# Altium PCB ECG_Signals_V1.0_ZM_20211208.PcbDoc (part 2 of 2)
Units mil, origin at the board's own origin, x right, y up, seen from the top; angles counter-clockwise.
Board outline 3748.77 x 3514.74 mil, 2 copper layers (Top Layer, Bottom Layer); 331 components, 192 nets, 916 pads, 807 vias.
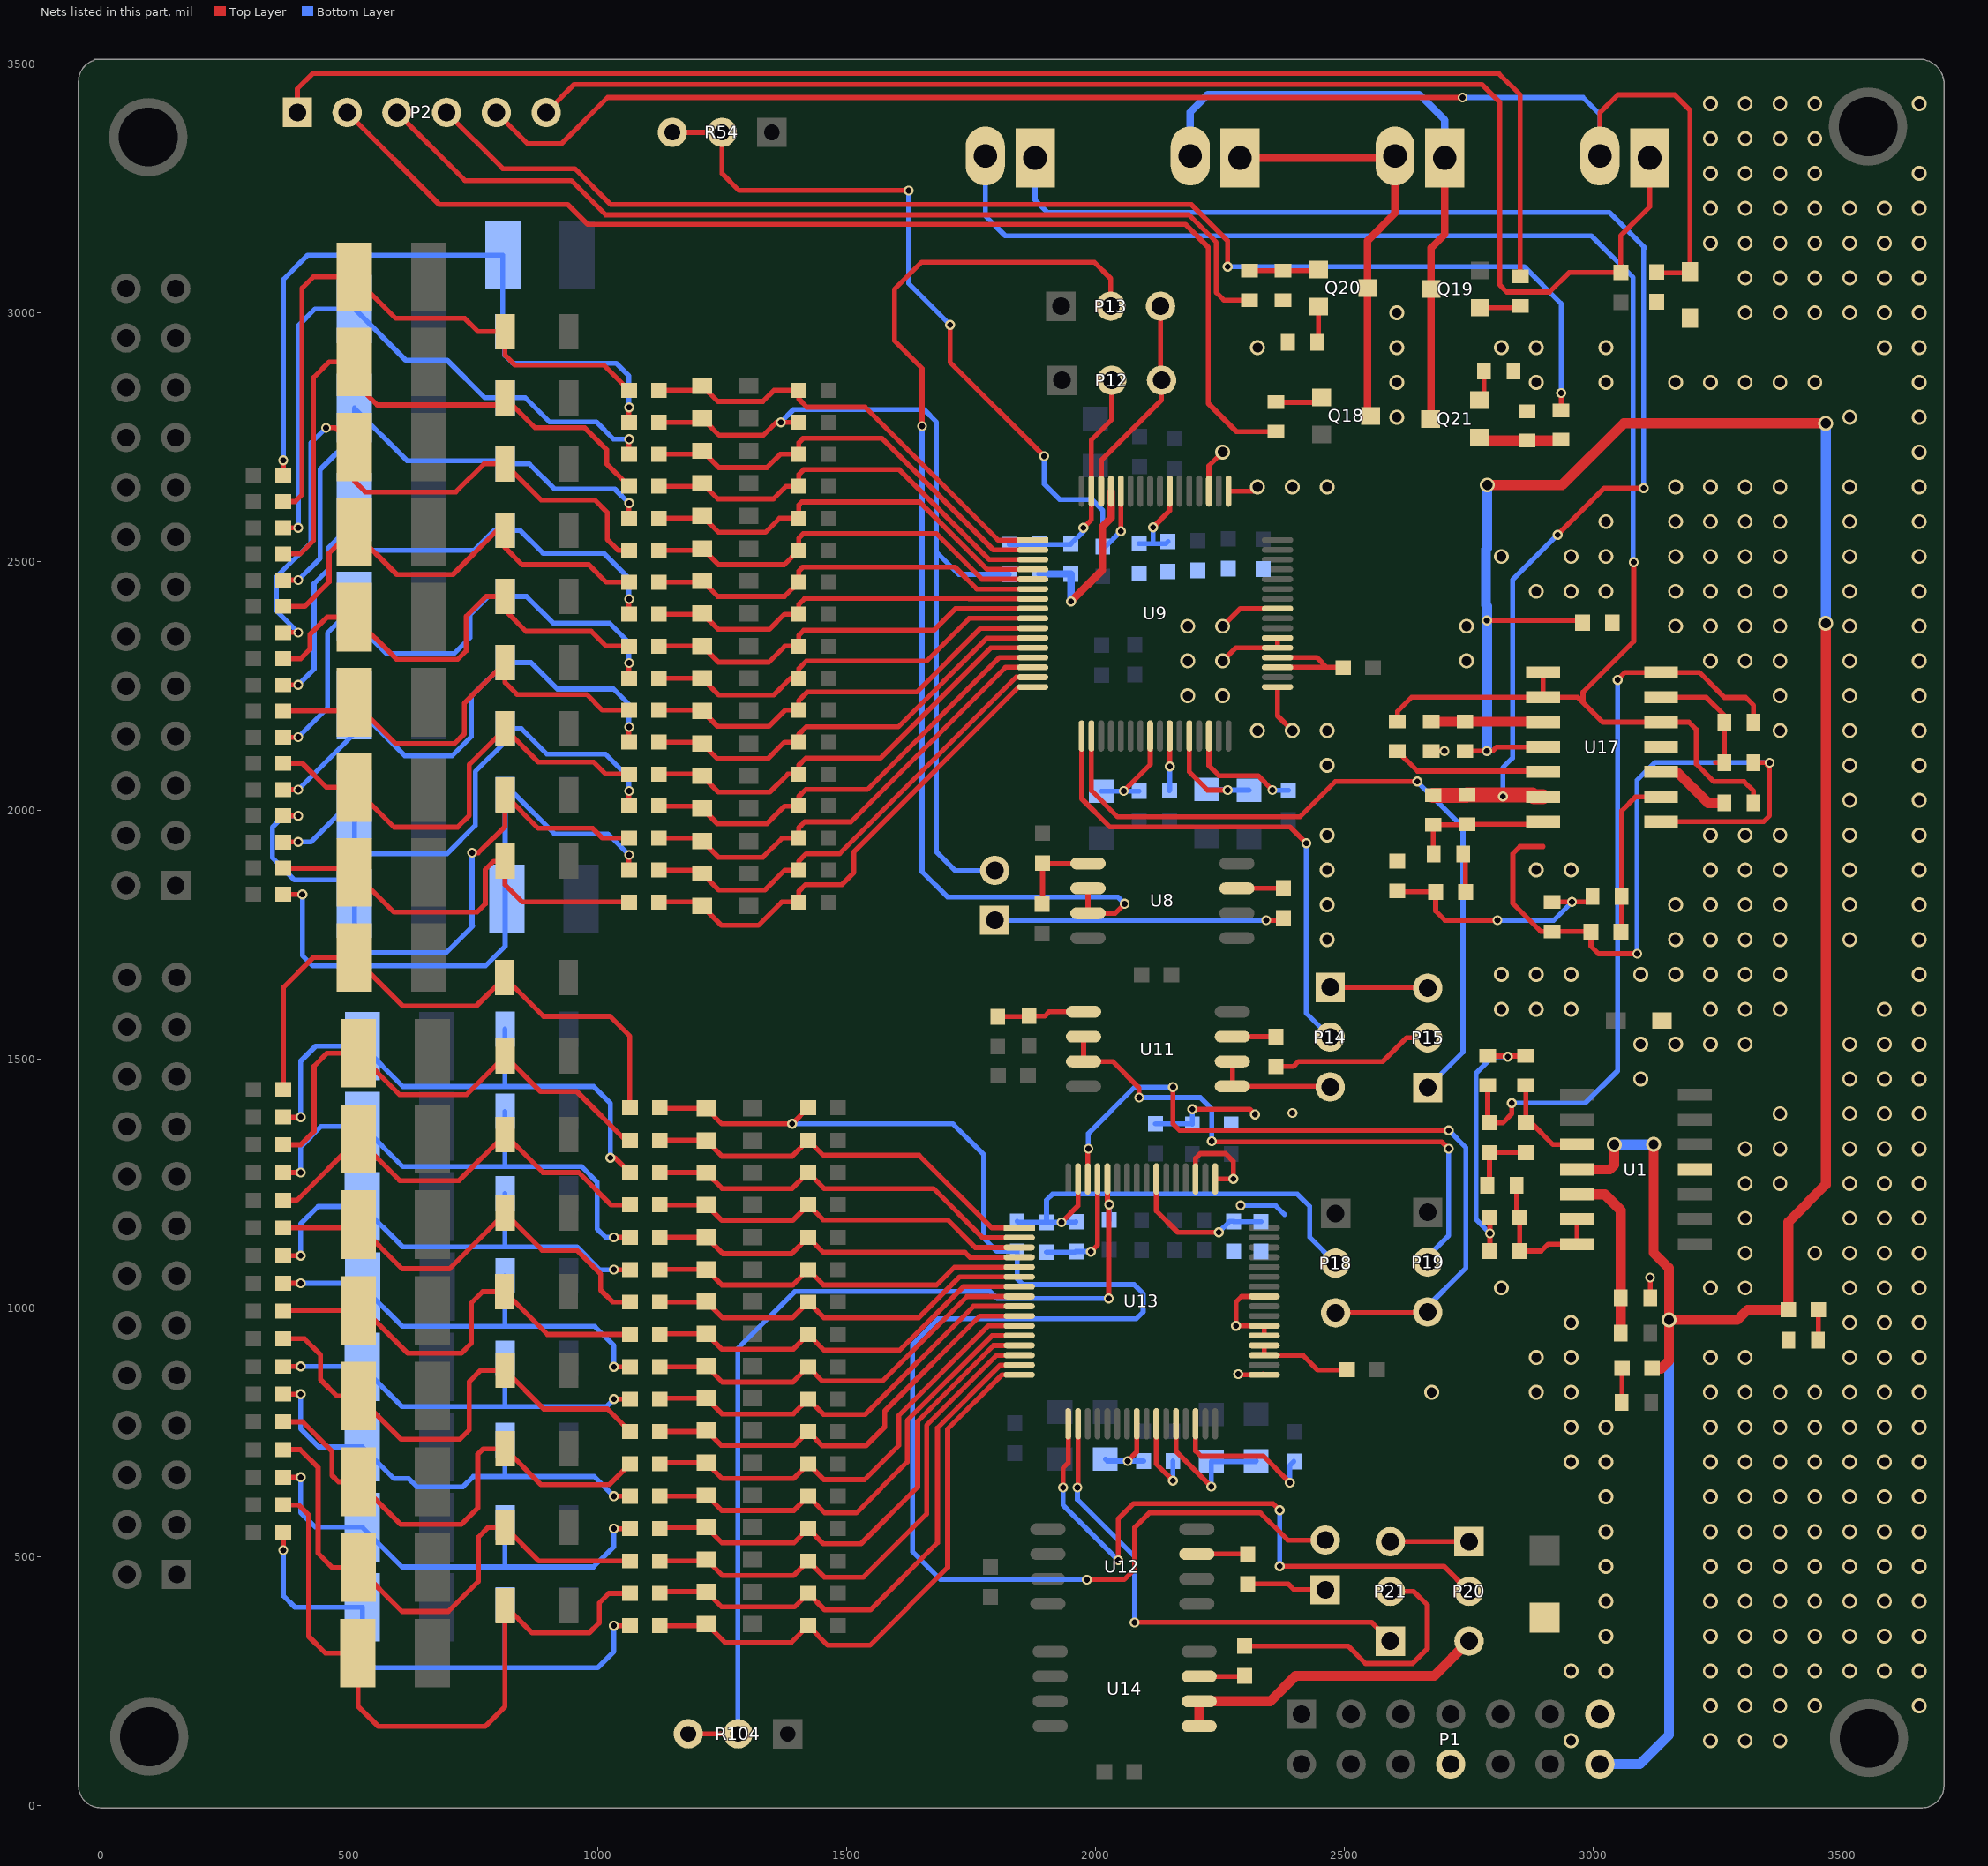
[diagram p2: the nets of this part, all layers, seen from the top]

## Via types
v1: diameter 30, hole 20, Top Layer to Bottom Layer, tented both sides, 564 vias
v2: diameter 20, hole 12, Top Layer to Bottom Layer, tented both sides, 243 vias

## Nets (pads, with @x,y where several pads share a name; then routed paths per layer and width w, separated by ;. In a path a pad name is that pad's centre, name@x,y a point inside that pad or via, vN(x,y) a via of type N, cw(c..) or ccw(c..) an arc to the next point about the centre after c; other vN are vias at no path point) (continued)
GND: C38.1 C41.1 C95.1 C96.1 C97.1 C100.1 C101.1 C148.1 C149.1 C150.1 C155.1 C160.2 P1.8 P1.13 R145.1 R160.1 R164.2 R172.1 R178.2 RC5.1 RC6.2 RC7.2 RC8.1 TVS41.1 TVS42.1 U1.11 U9.33 U9.37 U9.38 U9.41 U9.49 U9.51 U13.33 U13.37 U13.38 U13.41 U13.49 U13.51 U17.11 | length 1354.5
  Top Layer w10: v2(2194,1399.09) 2309.54,1399.09 v2(2320,1388.63) ; U13.51@2200.43,1259 2200.43,1300.43 2209.88,1309.88 2260.61,1309.88 2276.37,1294.12 v2(2276.37,1259) U13.49@2239.8,1259 ; U9.51@2227.33,2641.54 2227.33,2692.33 v1(2255,2720) ; v1(2255,2300) 2281.57,2326.57 U9.37@2365.13,2326.57 U9.38@2365.13,2346.26 ; v1(2255,2370) 2290.31,2405.31 U9.41@2365.13,2405.31 ; U9.49@2266.7,2641.54 2316.54,2641.54 v1(2325,2650) ; v2(2286,866.63) 2287.33,865.3 U13.33@2338.22,865.3 U13.33@2336.89,866.63 ; U13.37@2338.22,944.04 U13.38@2338.22,963.72 v2(2281.91,963.72) 2281.91,1011.78 2292.9,1022.78 U13.41@2338.22,1022.78 ; U9.33@2365.13,2247.83 2365.13,2189.87 v1(2395,2160) ; R172.1@2674,2119 v2(2700.63,2119) ; R178.2@3114.06,1020 v2(3114.06,1060.93)
  Bottom Layer w10: C150.1@2120,1370 2193,1370 C149.1@2194,1369 v2(2194,1399.09) ; v2(2291,1205.63) 2361,1205.63 2379,1187.63
  other v1: 2955,130 3235,130 3305,130 3375,130 3235,200 3305,200 3375,200 3445,200 3655,200 2955,270 3025,270 3235,270 3305,270 3375,270 3445,270 3515,270 3585,270 3655,270 3025,340 3235,340 3305,340 3375,340 3445,340 3515,340 3585,340 3655,340 3025,410 3235,410 3305,410 3375,410 3445,410 3515,410 3585,410 3655,410 3025,480 3235,480 3305,480 3375,480 3445,480 3515,480 3585,480 3655,480 3025,550 3235,550 3305,550 3375,550 3445,550 3515,550 3585,550 3655,550 3025,620 3235,620 3305,620 3375,620 3445,620 3515,620 3585,620 3655,620 2955,690 3025,690 3235,690 3305,690 3375,690 3445,690 3515,690 3585,690 3655,690 2955,760 3025,760 3235,760 3305,760 3375,760 3445,760 3515,760 3585,760 3655,760 2675,830 2885,830 2955,830 3235,830 3305,830 3375,830 3445,830 3515,830 3585,830 3655,830 2885,900 2955,900 3235,900 3305,900 3515,900 3585,900 3655,900 2955,970 3515,970 3585,970 3655,970 2815,1040 3235,1040 3305,1040 3515,1040 3585,1040 3655,1040 3305,1110 3445,1110 3515,1110 3585,1110 3655,1110 3305,1180 3515,1180 3585,1180 3655,1180 3305,1250 3375,1250 3515,1250 3585,1250 3655,1250 3305,1320 3375,1320 3515,1320 3585,1320 3655,1320 3375,1390 3515,1390 3585,1390 3655,1390 3095,1460 3515,1460 3585,1460 3655,1460 3095,1530 3165,1530 3235,1530 3305,1530 3515,1530 3585,1530 3655,1530 2815,1600 2885,1600 2955,1600 3235,1600 3305,1600 3375,1600 3585,1600 3655,1600 2815,1670 2885,1670 2955,1670 3095,1670 3165,1670 3235,1670 3305,1670 3375,1670 3655,1670 2465,1740 3165,1740 3235,1740 3305,1740 3375,1740 3515,1740 3655,1740 2465,1810 3165,1810 3235,1810 3305,1810 3375,1810 3515,1810 3655,1810 2465,1880 2885,1880 2955,1880 3235,1880 3305,1880 3375,1880 3515,1880 3655,1880 2465,1950 3235,1950 3305,1950 3375,1950 3515,1950 3655,1950 3515,2020 3655,2020 2465,2090 3515,2090 3655,2090 2325,2160 2465,2160 3375,2160 3515,2160 3655,2160 2185,2230 2255,2230 3375,2230 3515,2230 3655,2230 2185,2300 2745,2300 3235,2300 3305,2300 3375,2300 3515,2300 3655,2300 2185,2370 2745,2370 3165,2370 3235,2370 3305,2370 3375,2370 3515,2370 3655,2370 2885,2440 2955,2440 3025,2440 3165,2440 3235,2440 3305,2440 3375,2440 3515,2440 3655,2440 2815,2510 2955,2510 3025,2510 3165,2510 3235,2510 3305,2510 3375,2510 3515,2510 3655,2510 3025,2580 3165,2580 3235,2580 3305,2580 3375,2580 3515,2580 3655,2580 2395,2650 2465,2650 3165,2650 3235,2650 3305,2650 3375,2650 3515,2650 3655,2650 3655,2720 2605,2790 3515,2790 3655,2790 2605,2860 2885,2860 3025,2860 3165,2860 3235,2860 3305,2860 3375,2860 3445,2860 3655,2860 2325,2930 2605,2930 2815,2930 2885,2930 3025,2930 3585,2930 3655,2930 2605,3000 3305,3000 3375,3000 3445,3000 3515,3000 3585,3000 3655,3000 3305,3070 3375,3070 3445,3070 3515,3070 3585,3070 3655,3070 3235,3140 3305,3140 3375,3140 3445,3140 3515,3140 3585,3140 3655,3140 3235,3210 3305,3210 3375,3210 3445,3210 3515,3210 3585,3210 3655,3210 3235,3280 3305,3280 3375,3280 3445,3280 3655,3280 3235,3350 3305,3350 3375,3350 3445,3350 3235,3420 3305,3420 3375,3420 3445,3420 3655,3420
  other v2: 2395,1391.63
IN1N: C46.2 R63.2 TVS2.2 U9.15 | length 955.3
  Top Layer w10: R63.2@1122,1879.9 1202.06,1879.9 TVS2.2@1209,1872.97 1242.34,1839.63 1335,1839.63 1375.27,1879.9 C46.2@1403,1879.9 1403,1897.63 1418,1912.63 1485,1912.63 1839.89,2267.52 U9.15@1873,2267.52
IN1P: C43.2 R61.2 TVS1.2 U9.16 | length 1006.1
  Top Layer w10: R61.2@1122,1815.63 1201,1815.63 TVS1.2@1209,1807.63 1248,1768.63 1322,1768.63 1369,1815.63 C43.2@1403,1815.63 1403,1837 1416.63,1850.63 1490,1850.63 1514,1874.63 1514,1916.63 1845.2,2247.83 U9.16@1873,2247.83
IN2N: C58.2 R70.2 TVS7.2 U9.13 | length 915.5
  Top Layer w10: R70.2@1122,2008.45 1204.19,2008.45 TVS7.2@1209,2003.64 1240.01,1972.63 1339,1972.63 1374.82,2008.45 C58.2@1403,2008.45 1403,2027.63 1417,2041.63 1541,2041.63 1806.26,2306.89 U9.13@1873,2306.89
IN2P: C53.2 R68.2 TVS6.2 U9.14 | length 937
  Top Layer w10: R68.2@1122,1944.18 1203.12,1944.18 TVS6.2@1209,1938.3 1241.67,1905.63 1331,1905.63 1369.55,1944.18 C53.2@1403,1944.18 1403,1964.63 1415,1976.63 1508,1976.63 1818.57,2287.2 U9.14@1873,2287.2
IN3N: C62.2 R75.2 TVS9.2 U9.11 | length 874.5
  Top Layer w10: R75.2@1122,2137 1206.31,2137 TVS9.2@1209,2134.31 1239.68,2103.63 1341,2103.63 1374.37,2137 C62.2@1403,2137 1403,2152.63 1418,2167.63 1603,2167.63 1781.63,2346.26 U9.11@1873,2346.26
IN3P: C60.2 R73.2 TVS8.2 U9.12 | length 896.5
  Top Layer w10: R73.2@1122,2072.72 1205.25,2072.72 TVS8.2@1209,2068.97 1241.34,2036.63 1345,2036.63 1381.09,2072.72 C60.2@1403,2072.72 1403,2090.63 1417,2104.63 1567,2104.63 1788.94,2326.57 U9.12@1873,2326.57
IN4N: C66.2 R82.2 TVS11.2 U9.9 | length 840
  Top Layer w10: R82.2@1122,2265.54 1208.44,2265.54 TVS11.2@1209,2264.98 1242.35,2231.63 1353,2231.63 1386.91,2265.54 C66.2@1403,2265.54 1403,2284.63 1418,2299.63 1659.63,2299.63 1745.63,2385.63 U9.9@1873,2385.63
IN4P: C64.2 R80.2 TVS10.2 U9.10 | length 857.6
  Top Layer w10: R80.2@1122,2201.27 1207.38,2201.27 TVS10.2@1209,2199.64 1240.01,2168.63 1343,2168.63 1375.64,2201.27 C64.2@1403,2201.27 1403,2220.63 1420,2237.63 1640,2237.63 1768.31,2365.94 U9.10@1873,2365.94
IN5N: C70.2 R87.2 TVS13.2 U9.7 | length 802.3
  Top Layer w10: R87.2@1122,2394.09 1207.44,2394.09 TVS13.2@1209,2395.65 1241.02,2363.63 1344,2363.63 1374.46,2394.09 C70.2@1403,2394.09 1403,2413.63 1415,2425.63 1745,2425.63 1745.63,2425 U9.7@1873,2425
IN5P: C68.2 R85.2 TVS12.2 U9.8 | length 822.1
  Top Layer w10: R85.2@1122,2329.81 1208.5,2329.81 TVS12.2@1209,2330.31 1241.68,2297.63 1343,2297.63 1375.18,2329.81 C68.2@1403,2329.81 1403,2351.63 1413,2361.63 1674.32,2361.63 1718,2405.31 U9.8@1873,2405.31
IN6N: C75.2 R91.2 TVS15.2 U9.5 | length 843.6
  Top Layer w10: R91.2@1122,2522.63 1205.31,2522.63 TVS15.2@1209,2526.32 1241.69,2493.63 1374,2493.63 C75.2@1403,2522.63 1403,2546.63 1412,2555.63 1680,2555.63 1771.26,2464.37 U9.5@1873,2464.37
IN6P: C73.2 R89.2 TVS14.2 U9.6 | length 820.6
  Top Layer w10: R89.2@1122,2458.36 1206.38,2458.36 TVS14.2@1209,2460.99 1240.17,2429.81 1374.45,2429.81 C73.2@1403,2458.36 1403,2480.63 1411,2488.63 1717,2488.63 1760.94,2444.69 U9.6@1873,2444.69
IN7N: C85.2 R96.2 TVS17.2 U9.3 | length 879.5
  Top Layer w10: R96.2@1122,2651.18 1203.19,2651.18 TVS17.2@1209,2656.99 1240.36,2625.63 1352,2625.63 1377.55,2651.18 C85.2@1403,2651.18 1403,2674.63 1413,2684.63 1605,2684.63 1785.89,2503.74 U9.3@1873,2503.74
IN7P: C83.2 R94.2 TVS16.2 U9.4 | length 863.7
  Top Layer w10: R94.2@1122,2586.91 1204.25,2586.91 TVS16.2@1209,2591.66 1242.03,2558.63 1336,2558.63 1364.28,2586.91 C83.2@1403,2586.91 1403,2613.63 1409,2619.63 1646,2619.63 1781.57,2484.06 U9.4@1873,2484.06
IN8N: C89.2 R100.2 TVS19.2 U9.1 | length 911.8
  Top Layer w10: R100.2@1122,2844 1200,2844 TVS19.2@1209,2853 1240.37,2821.63 1331,2821.63 1353.37,2844 C89.2@1403,2844 1403,2826.63 1419.57,2810.06 1536.57,2810.06 1803.52,2543.11 U9.1@1873,2543.11
IN8P: C87.2 R98.2 TVS18.2 U9.2 | length 898.7
  Top Layer w10: R98.2@1122,2715.45 1202.12,2715.45 TVS18.2@1209,2722.33 1242.7,2688.63 1339,2688.63 1365.82,2715.45 C87.2@1403,2715.45 1403,2738.63 1412,2747.63 1570,2747.63 1794.2,2523.43 U9.2@1873,2523.43
IN21N: C105.2 R109.2 TVS21.2 U13.15 | length 1100.9
  Top Layer w10: R109.2@1123.75,426.06 1127.09,429.4 TVS21.2@1217.29,429.4 1248.06,398.63 1394.57,398.63 C105.2@1422,426.06 1455.43,392.63 1547,392.63 1682,527.63 1682,758.63 1808.35,884.98 U13.15@1846.09,884.98
IN21P: C103.2 R107.2 TVS20.2 U13.16 | length 1158.4
  Top Layer w10: R107.2@1123.75,361.01 1213.67,361.01 TVS20.2@1217.29,364.63 1255.29,326.63 1387.62,326.63 C103.2@1422,361.01 1461.38,321.63 1546,321.63 1702.37,478 1702.37,756.37 1811.3,865.3 U13.16@1846.09,865.3
IN22N: C111.2 R116.2 TVS24.2 U13.13 | length 1003.6
  Top Layer w10: R116.2@1123.75,556.17 1126.52,558.95 TVS24.2@1217.29,558.95 1248.61,527.63 1393.46,527.63 C111.2@1422,556.17 1452.54,525.63 1528,525.63 1642,639.63 1642,772 1794.35,924.35 U13.13@1846.09,924.35
IN22P: C109.2 R114.2 TVS23.2 U13.14 | length 1051.8
  Top Layer w10: R114.2@1123.75,491.12 1214.23,491.12 TVS23.2@1217.29,494.18 1249.84,461.63 1392.51,461.63 C109.2@1422,491.12 1454.49,458.63 1533,458.63 1660,585.63 1660,763.63 1801.04,904.67 U13.14@1846.09,904.67
IN23N: C115.2 R121.2 TVS26.2 U13.11 | length 925.3
  Top Layer w10: R121.2@1123.75,686.28 1125.96,688.5 TVS26.2@1217.29,688.5 1249.16,656.63 1392.35,656.63 C115.2@1422,686.28 1453.65,654.63 1535.38,654.63 1604.5,723.75 1604.5,784.13 1784.09,963.72 U13.11@1846.09,963.72
IN23P: C113.2 R119.2 TVS25.2 U13.12 | length 958.7
  Top Layer w10: R119.2@1123.75,621.23 1214.8,621.23 TVS25.2@1217.29,623.72 1248.38,592.63 1393.4,592.63 C113.2@1422,621.23 1455.6,587.63 1518.74,587.63 1621,689.89 1621,773.63 1791.41,944.04 U13.12@1846.09,944.04
IN24N: C119.2 R126.2 TVS28.2 U13.9 | length 851.2
  Top Layer w10: R126.2@1123.75,816.39 1125.4,818.04 TVS28.2@1217.29,818.04 1248.7,786.63 1392.24,786.63 C119.2@1422,816.39 1452.76,785.63 1537,785.63 1754.46,1003.09 U13.9@1846.09,1003.09
IN24P: C117.2 R124.2 TVS27.2 U13.10 | length 885.4
  Top Layer w10: R124.2@1123.75,751.34 1215.36,751.34 TVS27.2@1217.29,753.27 1246.93,723.63 1394.29,723.63 C117.2@1422,751.34 1450.71,722.63 1537.77,722.63 1575.92,760.78 1575.92,792.55 1766.78,983.41 U13.10@1846.09,983.41
IN25N: C123.2 R131.2 TVS30.2 U13.7 | length 814.1
  Top Layer w10: R131.2@1123.75,946.51 1124.83,947.59 TVS30.2@1217.29,947.59 1248.25,916.63 1392.12,916.63 C123.2@1422,946.51 1453.88,914.63 1606,914.63 1733.83,1042.46 U13.7@1846.09,1042.46
IN25P: C121.2 R129.2 TVS29.2 U13.8 | length 831.4
  Top Layer w10: R129.2@1123.75,881.45 1215.93,881.45 TVS29.2@1217.29,882.81 1249.48,850.63 1391.18,850.63 C121.2@1422,881.45 1450.82,852.63 1571,852.63 1741.15,1022.78 U13.8@1846.09,1022.78
IN26N: C128.2 R135.2 TVS32.2 U13.5 | length 776.3
  Top Layer w10: R135.2@1123.75,1076.62 1124.27,1077.13 TVS32.2@1217.29,1077.13 1248.8,1045.63 1391.01,1045.63 C128.2@1422,1076.62 1452.99,1045.63 1680,1045.63 1716.2,1081.83 U13.5@1846.09,1081.83
IN26P: C126.2 R133.2 TVS31.2 U13.6 | length 796.9
  Top Layer w10: R133.2@1123.75,1011.56 1216.49,1011.56 TVS31.2@1217.29,1012.36 1250.02,979.63 1390.07,979.63 C126.2@1422,1011.56 1453.93,979.63 1644,979.63 1726.52,1062.15 U13.6@1846.09,1062.15
IN27N: C138.2 R140.2 TVS34.2 U13.3 | length 783.5
  Top Layer w10: R140.2@1123.75,1206.73 1123.79,1206.68 TVS34.2@1217.29,1206.68 1248.34,1175.63 1390.9,1175.63 C138.2@1422,1206.73 1452.1,1176.63 1702.37,1176.63 1757.8,1121.2 U13.3@1846.09,1121.2
IN27P: C136.2 R138.2 TVS33.2 U13.4 | length 766.5
  Top Layer w10: R138.2@1123.75,1141.67 1217.06,1141.67 TVS33.2@1217.29,1141.91 1250.57,1108.63 1388.96,1108.63 C136.2@1422,1141.67 1452.04,1111.63 1737,1111.63 1747.11,1101.52 U13.4@1846.09,1101.52
IN28N: C142.2 R144.2 TVS36.2 U13.1 | length 822
  Top Layer w10: R144.2@1123.75,1336.84 1216.68,1336.84 TVS36.2@1217.29,1336.23 1248.89,1304.63 1389.79,1304.63 C142.2@1422,1336.84 1452.21,1306.63 1645,1306.63 1791.06,1160.57 U13.1@1846.09,1160.57
IN28P: C140.2 R142.2 TVS35.2 U13.2 | length 803.2
  Top Layer w10: R142.2@1123.75,1271.78 1216.96,1271.78 TVS35.2@1217.29,1271.45 1249.11,1239.63 1389.85,1239.63 C140.2@1422,1271.78 1454.15,1239.63 1674,1239.63 1772.74,1140.89 U13.2@1846.09,1140.89
IRD: JC2.2 JC3.1 Q18.3 Q20.3 | length 861
  Top Layer w15: JC3.1@2289.67,3311.06 2597.4,3311.06 JC2.2@2601.33,3315 2601.33,3199.96 2546.21,3144.84 Q20.3@2546.21,3049.63 2546.21,2798.63 Q18.3@2552.21,2792.63
NetC37_1: C37.1 R55.1 U9.61 | length 372.6
  Top Layer w15: v2(1950,2419.63) 2013,2482.63 2013,2569.63 2030.48,2587.11 U9.61@2030.48,2641.54
  Bottom Layer w15: R55.1@1888,2475 C37.1@1950,2475 v2(1950,2419.63)
NetC37_2: C37.2 P12.2 R55.2 R64.1 U9.63 | length 487.4
  Top Layer w10: v2(1975,2567.75) 1991.11,2583.86 U9.63@1991.11,2641.54 1991.11,2744.48 2032,2785.37 P12.2@2032,2864
  Bottom Layer w10: R64.1@1826,2534 1949,2534 C37.2@1950,2535 1975,2560 v2(1975,2567.75)
NetC38_2: C38.2 C41.2 U9.55 | length 180.3
  Top Layer w10: v2(2115,2568.63) 2148.59,2602.22 U9.55@2148.59,2641.54
  Bottom Layer w10: C41.2@2087,2536 2118,2536 ; v2(2115,2568.63) 2115,2539 2118,2536 ; C38.2@2145,2540 2141,2536 2118,2536
NetC42_2: C42.2 DS2.1 R60.2 R61.1 | length 876.3
  Top Layer w10: R60.2@367,1883.62 501.37,1883.62 DS2.1@510,1875 589.9,1795.1 756.47,1795.1 773,1811.63 773,1880.63 790,1897.63 C42.2@812.8,1897.63 812.8,1850.2 847.37,1815.63 R61.1@1062,1815.63
NetC44_2: C44.2 DS3.1 R62.2 R63.1 | length 1228.5
  Top Layer w10: R62.2@367,1831 v2(405.37,1831) ; R63.1@1062,1879.9 v2(1062,1910.08)
  Bottom Layer w10: v2(405.37,1831) 405.37,1708.26 426.63,1687 773.37,1687 813,1726.63 C44.2@813,2031.63 833,2031.63 912,1952.63 1019.45,1952.63 v2(1062,1910.08)
NetC47_2: C47.2 DS4.1 R65.2 R66.1 | length 1418
  Top Layer w10: R65.2@367,2673 v2(367,2703.18) ; R66.1@1062,2779.73 v2(1062,2809.9)
  Bottom Layer w10: v2(367,2703.18) 367,3066.63 416,3115.63 DS4.1@808.27,3115.63 808.27,2965.73 C47.2@812,2962 812,2914.63 828,2898.63 1036,2898.63 1062,2872.63 v2(1062,2809.9)
NetC48_2: C48.2 P11.2 R64.2 R66.2 TVS5.2 | length 1797.3
  Top Layer w10: R66.2@1122,2779.73 1216.94,2779.73 1243.03,2753.63 1332,2753.63 1358.1,2779.73 v2(1367,2779.73) C48.2@1403,2779.73
  Bottom Layer w10: v2(1367,2779.73) 1392.49,2805.22 1654.78,2805.22 1680,2780 1680,2518.63 ; P11.2@1796.91,1879 1717,1879 1680,1916 1680,2518.63 ; R64.2@1826,2474 1724.63,2474 1680,2518.63
NetC49_2: C49.2 DS5.1 R67.2 R68.1 | length 1306.4
  Top Layer w10: R67.2@367,1988.88 v2(397.18,1988.88) ; v2(746.6,1914.63) 759.12,1914.63 788.55,1944.06 789.43,1944.06 812.8,1967.43 C49.2@812.8,2030.68 879.84,1963.63 989,1963.63 1008.45,1944.18 R68.1@1062,1944.18
  Bottom Layer w10: v2(397.18,1988.88) 368.25,1988.88 345,1965.63 345,1904.63 389.43,1860.2 510,1860.2 DS5.1@533.89,1836.32 ; DS5.1@510.2,1812.63 510.2,1725.43 522,1713.63 694,1713.63 748.02,1767.65 746.6,1769.08 v2(746.6,1914.63)
NetC54_2: C54.2 DS6.1 R69.2 R70.1 | length 1108.8
  Top Layer w10: R69.2@367,1936.25 v2(397.18,1936.25) ; R70.1@1062,2008.45 v2(1062,2038.63)
  Bottom Layer w10: v2(397.18,1936.25) 422.62,1936.25 510,2023.63 DS6.1@510,2011.8 510,1936.63 534,1912.63 696.33,1912.63 753,1969.3 753,2077.63 812.8,2137.43 C54.2@812.8,2163.72 845.91,2163.72 897,2112.63 1015,2112.63 1062,2065.63 v2(1062,2038.63)
NetC59_2: C59.2 DS7.1 R72.2 R73.1 | length 927.5
  Top Layer w10: R72.2@367,2094.12 405.5,2094.12 453.63,2046 DS7.1@510,2046 589.9,1966.1 717.47,1966.1 741,1989.63 741,2091.93 C59.2@812.8,2163.72 879.89,2096.63 991,2096.63 1014.91,2072.72 R73.1@1062,2072.72
NetC61_2: C61.2 DS8.1 R74.2 R75.1 | length 1071.4
  Top Layer w10: R74.2@367,2041.5 v2(397.18,2041.5) ; R75.1@1062,2137 v2(1062,2167.17)
  Bottom Layer w10: v2(397.18,2041.5) 510,2154.32 DS8.1@510,2206.61 ; DS8.1@510,2210.96 611.33,2109.63 706.5,2109.63 745,2148.13 745,2228.97 C61.2@812.8,2296.77 864.86,2296.77 918,2243.63 1031,2243.63 1062,2212.63 v2(1062,2167.17)
NetC63_2: C63.2 DS9.1 R77.2 R80.1 | length 903.2
  Top Layer w10: R77.2@367,2199.38 492.38,2199.38 DS9.1@510,2217 593.37,2133.63 710.88,2133.63 730.94,2153.69 730.94,2214.91 C63.2@812.8,2296.77 812.8,2256.83 837,2232.63 977,2232.63 1008.36,2201.27 R80.1@1062,2201.27
NetC65_2: C65.2 DS10.1 R81.2 R82.1 | length 1103.5
  Top Layer w10: R81.2@367,2146.75 v2(397.18,2146.75) ; R82.1@1062,2265.54 v2(1062,2295.72)
  Bottom Layer w10: v2(397.18,2146.75) 456,2205.57 456,2356.13 DS10.1@510,2410.13 ; DS10.1@510,2379.81 575,2314.82 710.19,2314.82 742,2346.63 742,2392.63 779.18,2429.81 C65.2@812.8,2429.81 855.82,2429.81 910,2375.63 1023,2375.63 1062,2336.63 v2(1062,2295.72)
NetC67_2: C67.2 DS11.1 R84.2 R85.1 | length 932.7
  Top Layer w10: R84.2@367,2304.62 402,2304.62 420.5,2323.13 420.5,2353.13 455.37,2388 DS11.1@510,2388 594.37,2303.63 718,2303.63 735,2320.63 735,2389.88 774.94,2429.81 C67.2@812.8,2429.81 812.8,2401.83 855,2359.63 986,2359.63 1015.82,2329.81 R85.1@1062,2329.81
NetC69_2: C69.2 DS12.1 R86.2 R87.1 | length 1086.6
  Top Layer w10: R86.2@367,2252 v2(397.18,2252) ; R87.1@1062,2394.09 v2(1062,2424.26)
  Bottom Layer w10: v2(397.18,2252) 429,2283.82 429,2455.63 459,2485.63 459,2528.63 483.39,2553.02 510,2553.02 540.39,2522.63 751,2522.63 791.23,2562.86 C69.2@812.8,2562.86 842.77,2562.86 889.2,2516.43 1011.2,2516.43 1062,2465.63 v2(1062,2424.26)
NetC72_2: C72.2 DS13.1 R88.2 R89.1 | length 926.9
  Top Layer w10: R88.2@367,2409.88 410.25,2409.88 459.25,2458.88 459.25,2516.88 501.37,2559 DS13.1@510,2559 595.37,2473.63 708,2473.63 797.23,2562.86 C72.2@812.8,2562.86 812.8,2527.83 847,2493.63 981,2493.63 1016.27,2458.36 R89.1@1062,2458.36
NetC74_2: C74.2 DS14.1 R90.2 R91.1 | length 1330.5
  Top Layer w10: R90.2@367,2357.25 v2(397.18,2357.25) ; v2(453,2768.63) 471.37,2768.63 DS14.1@510,2730 510,2661.54 531.91,2639.63 714,2639.63 770.28,2695.91 C74.2@812.8,2695.91 885.07,2623.63 993,2623.63 1018,2598.63 1018,2544.63 1040,2522.63 R91.1@1062,2522.63
  Bottom Layer w10: v2(397.18,2357.25) 353,2401.43 353,2468.63 422.62,2538.25 422.62,2738.25 v2(453,2768.63)
NetC76_2: C76.2 C77.2 U9.24 | length 208.8
  Top Layer w10: v2(2056,2038.63) 2109.22,2091.85 U9.24@2109.22,2149.41
  Bottom Layer w10: C77.2@2011,2038.63 v2(2056,2038.63) C76.2@2087,2038.63
NetC78_2: C78.2 U9.26 | length 110
  Top Layer w10: v2(2148.59,2087.94) U9.26@2148.59,2149.41
  Bottom Layer w10: C78.2@2148,2039.63 2148.59,2040.22 v2(2148.59,2087.94)
NetC79_2: C79.2 C80.2 U9.28 | length 250.3
  Top Layer w10: U9.28@2187.96,2149.41 2187.96,2077.04 2224.37,2040.63 v2(2265,2040.63)
  Bottom Layer w10: C80.2@2223,2042 2263.63,2042 v2(2265,2040.63) 2307.37,2040.63 C79.2@2308,2040
NetC81_2: C81.2 U9.30 | length 239.9
  Top Layer w10: U9.30@2227.33,2149.41 2227.33,2089.67 2247.37,2069.63 2326,2069.63 v2(2355,2040.63)
  Bottom Layer w10: v2(2355,2040.63) 2355.41,2040.22 C81.2@2387,2040.22
NetC82_2: C82.2 DS15.1 R93.2 R94.1 | length 1084.3
  Top Layer w10: R93.2@367,2462.5 v2(397.18,2462.5) ; R94.1@1062,2586.91 v2(1062,2617.08)
  Bottom Layer w10: v2(397.18,2462.5) 441,2506.32 441,2684.63 510,2753.63 DS15.1@510,2808.46 615.83,2702.63 806.07,2702.63 C82.2@812.8,2695.91 861.72,2695.91 912,2645.63 1033.45,2645.63 v2(1062,2617.08)
NetC84_2: C84.2 DS16.1 R95.2 R96.1 | length 1195
  Top Layer w10: R95.2@367,2515.12 401,2515.12 428,2542.12 428,2869.63 459.37,2901 DS16.1@510,2901 ; DS16.1@510,2893.63 510,2860.63 556,2814.63 798.47,2814.63 C84.2@812.8,2828.95 873.12,2768.63 973,2768.63 1017,2724.63 1017,2696.18 R96.1@1062,2651.18
NetC86_2: C86.2 DS17.1 R97.2 R98.1 | length 1253.8
  Top Layer w10: R97.2@367,2567.75 v2(397.18,2567.75) ; R98.1@1062,2715.45 v2(1062,2745.63)
  Bottom Layer w10: v2(397.18,2567.75) 397.18,2973.81 431,3007.63 DS17.1@510.2,3007.63 613.2,2904.63 696.32,2904.63 772,2828.95 C86.2@812.8,2828.95 853.68,2828.95 902,2780.63 996,2780.63 1031,2745.63 v2(1062,2745.63)
NetC88_2: C88.2 DS18.1 R99.2 R100.1 | length 1247.4
  Top Layer w10: R99.2@367,2620.38 391,2620.38 405,2634.38 405,3049.63 427.37,3072 DS18.1@510,3072 593.37,2988.63 732,2988.63 758.63,2962 C88.2@812.8,2962 812.8,2914.83 833,2894.63 1011.37,2894.63 R100.1@1062,2844
NetC99_1: C99.1 R105.1 U13.61 | length 241.7
  Top Layer w10: v2(1990,1112.63) 2003.57,1126.2 U13.61@2003.57,1259
  Bottom Layer w10: R105.1@1901,1111.63 1958.63,1111.63 C99.1@1960,1113 1989.63,1113 v2(1990,1112.63)
NetC99_2: C99.2 P18.2 R105.2 R110.1 U13.63 | length 945.4
  Top Layer w10: v2(1931,1171.63) 1964.2,1204.83 U13.63@1964.2,1259
  Bottom Layer w10: R110.1@1842,1173.63 1844,1171.63 R105.2@1901,1171.63 ; C99.2@1960,1173 1958.63,1171.63 v2(1931,1171.63) R105.2@1901,1171.63 ; P18.2@2482,1089.63 2429.5,1142.13 2429.5,1204.13 2405,1228.63 1913,1228.63 1901,1216.63 R105.2@1901,1171.63
NetC100_2: C100.2 C101.2 U13.55 | length 301.6
  Top Layer w10: U13.55@2121.69,1259 2121.69,1194.57 2164.63,1151.63 v2(2247,1151.63)
  Bottom Layer w10: v2(2247,1151.63) 2269,1173.63 C100.2@2277,1173.63 ; C100.2@2277,1173 C101.2@2332,1173
NetC102_2: C102.2 DS19.1 R106.2 R107.1 | length 1136.5
  Top Layer w10: v2(367,512.95) R106.2@367,548 ; v2(1031.6,361.01) R107.1@1063.75,361.01 R107.1@1067.5,361.01
  Bottom Layer w10: v2(367,512.95) 367,421.63 390.63,398 DS19.1@525.95,398 525.95,299.68 549,276.63 812,276.63 ; C102.2@812.8,403 812.8,277.43 812,276.63 ; v2(1031.6,361.01) 1031.6,309.23 999,276.63 812,276.63
NetC104_2: C104.2 DS20.1 R108.2 R109.1 | length 1384.2
  Top Layer w10: R108.2@367,603.69 397.94,603.69 418,583.63 418,339.63 452,305.63 DS20.1@517.2,305.63 517.2,199.43 558,158.63 773,158.63 812.8,198.43 C104.2@812.8,401 867.17,346.63 982,346.63 1002,366.63 1002,406.63 1021.43,426.06 R109.1@1063.75,426.06
NetC106_2: C106.2 DS21.1 R111.2 R112.1 | length 1183.1
  Top Layer w10: R111.2@367,1439 367,1643.63 427.37,1704 DS21.1@510,1704 607.37,1606.63 755.05,1606.63 C106.2@812.05,1663.63 890.05,1585.63 1024,1585.63 1063.75,1545.88 R112.1@1063.75,1401.89
NetC107_2: C107.2 P17.2 R110.2 R112.2 TVS22.2 | length 3225.6
  Top Layer w10: R112.2@1123.75,1401.89 1124.64,1401 TVS22.2@1217.29,1401 1248.66,1369.63 v2(1389.74,1369.63) C107.2@1422,1401.89 ; v2(1982,453.63) 2057,453.63 2078,474.63 2078,558.63 2107,587.63 2331,587.63 2385.63,533 P17.2@2461,533
  Bottom Layer w10: v2(1389.74,1369.63) 1713,1369.63 1775,1307.63 1775,1139.63 1801,1113.63 R110.2@1842,1113.63 1842,1058.63 1854,1046.63 2077,1046.63 2095,1028.63 2095,991.63 2081,977.63 1683,977.63 1632,926.63 1632,509.63 1688,453.63 v2(1982,453.63)
NetC108_2: C108.2 DS22.1 R113.2 R114.1 | length 1082.7
  Top Layer w10: R113.2@367,715.06 401,715.06 437,679.06 437,506.63 465.72,477.91 DS22.1@517.39,477.91 605.68,389.63 698.62,389.63 759,450.01 759,538.83 779,558.83 C108.2@812.8,558.83 880.51,491.12 R114.1@1063.75,491.12
NetC110_2: C110.2 DS23.1 R115.2 R116.1 | length 959.3
  Top Layer w10: R115.2@367,659.38 v2(402.05,659.38) ; v2(1031.6,556.17) R116.1@1063.75,556.17 R116.1@1067.5,556.17
  Bottom Layer w10: v2(402.05,659.38) 402.05,588.58 431.5,559.12 DS23.1@525.95,559.12 605.84,479.23 811,479.23 ; C110.2@812.8,568.29 812.8,481.02 811,479.23 ; v2(1031.6,556.17) 1031.6,520.23 990.6,479.23 811,479.23
NetC112_2: C112.2 DS24.1 R118.2 R119.1 | length 912.4
  Top Layer w10: R118.2@367,826.44 v2(402.05,826.44) ; v2(1031.6,621.23) R119.1@1063.75,621.23
  Bottom Layer w10: v2(402.05,826.44) 402.05,756.58 438.38,720.25 DS24.1@525.95,720.25 589.49,656.7 619.21,656.7 635.56,640.35 728.42,640.35 748.9,660.83 812.8,660.83 ; C112.2@812.8,733.57 812.8,660.83 ; v2(1031.6,621.23) 991.99,660.83 812.8,660.83
NetC114_2: C114.2 DS25.1 R120.2 R121.1 | length 983.8
  Top Layer w10: R120.2@367,770.75 405.88,770.75 465,711.63 465,663.2 478,650.2 DS25.1@517.39,650.2 602.96,564.63 725,564.63 758,597.63 758,705.63 769.03,716.66 C114.2@812.8,716.66 884.82,644.63 1022.09,644.63 R121.1@1063.75,686.28
NetC116_2: C116.2 DS26.1 R123.2 R124.1 | length 975.1
  Top Layer w10: R123.2@367,937.81 409.82,937.81 442,905.63 442,855.63 475.15,822.48 DS26.1@517.39,822.48 604.25,735.63 722,735.63 741,754.63 741,851.63 763.86,874.49 C116.2@812.8,874.49 890.65,796.63 1018.46,796.63 R124.1@1063.75,751.34
NetC118_2: C118.2 DS27.1 R125.2 R126.1 | length 838.8
  Top Layer w10: R125.2@367,882.12 v2(402.05,882.12) ; v2(1031.6,816.39) R126.1@1063.75,816.39 R126.1@1067.5,816.39
  Bottom Layer w10: v2(402.05,882.12) 525.2,882.12 DS27.1@525.95,881.38 605.84,801.48 816,801.48 ; C118.2@812.8,898.86 812.8,804.68 816,801.48 ; v2(1031.6,816.39) 1016.68,801.48 816,801.48
NetC120_2: C120.2 DS28.1 R128.2 R129.1 | length 896.5
  Top Layer w10: R128.2@367,1049.19 v2(402.05,1049.19) ; v2(1031.6,881.45) R129.1@1063.75,881.45 R129.1@1067.5,881.45
  Bottom Layer w10: v2(402.05,1049.19) 520.26,1049.19 DS28.1@526.95,1042.5 606.84,962.6 813,962.6 ; C120.2@812.8,1064.14 812.8,962.81 813,962.6 ; v2(1031.6,881.45) 1031.6,924.03 993.03,962.6 813,962.6
NetC122_2: C122.2 DS29.1 R130.2 R131.1 | length 867.2
  Top Layer w10: R130.2@367,993.5 368.27,994.77 DS29.1@517.39,994.77 530.86,994.77 617,908.63 725,908.63 745,928.63 745,1009.63 767.68,1032.31 C122.2@812.05,1032.31 897.86,946.51 R131.1@1063.75,946.51
NetC125_2: C125.2 DS30.1 R132.2 R133.1 | length 875
  Top Layer w10: R132.2@367,1160.56 510.9,1160.56 DS30.1@517.39,1167.05 605.82,1078.63 701.28,1078.63 C125.2@812.8,1190.14 887.31,1115.63 957,1115.63 1005,1067.63 1005,1035.63 1029.07,1011.56 R133.1@1063.75,1011.56
NetC127_2: C127.2 DS31.1 R134.2 R135.1 | length 938.4
  Top Layer w10: R134.2@367,1104.88 v2(402.05,1104.88) ; v2(1031.6,1076.62) R135.1@1063.75,1076.62 R135.1@1067.5,1076.62
  Bottom Layer w10: v2(402.05,1104.88) 402.05,1168.68 437,1203.62 DS31.1@525.95,1203.62 607.17,1122.4 812.8,1122.4 ; C127.2@812.8,1229.43 812.8,1122.4 ; v2(1031.6,1076.62) 1003.01,1076.62 957.23,1122.4 812.8,1122.4
NetC129_2: C129.2 C130.2 U13.24 | length 161.1
  Top Layer w10: v2(2064,692) 2082.31,710.32 U13.24@2082.31,766.87
  Bottom Layer w10: C130.2@2019,696 2023,692 v2(2064,692) C129.2@2096,692
NetC131_2: C131.2 U13.26 | length 167.4
  Top Layer w10: U13.26@2121.69,766.87 2121.69,685.94 v2(2155,652.63)
  Bottom Layer w10: v2(2155,652.63) C131.2@2155,692
NetC132_2: C132.2 C133.2 U13.28 | length 296.4
  Top Layer w10: U13.28@2161.06,766.87 2161.06,711.57 v2(2232,640.63)
  Bottom Layer w10: v2(2232,640.63) C132.2@2232,691 2321,691 C133.2@2322,692
NetC134_2: C134.2 U13.30 | length 316.3
  Top Layer w10: U13.30@2200.43,766.87 2200.43,712.2 2211,701.63 2337,701.63 v2(2390,648.63)
  Bottom Layer w10: v2(2390,648.63) 2390,683 C134.2@2398,691
NetC135_2: C135.2 DS32.1 R137.2 R138.1 | length 1028.8
  Top Layer w10: R137.2@367,1271.94 v2(402.05,1271.94) ; v2(1031.6,1141.67) R138.1@1063.75,1141.67 R138.1@1067.5,1141.67
  Bottom Layer w10: v2(402.05,1271.94) 402.05,1323.68 443.12,1364.75 DS32.1@526.2,1364.75 607.42,1283.52 815,1283.52 ; C135.2@812.8,1394.71 812.8,1285.73 815,1283.52 ; v2(1031.6,1141.67) 1014.96,1141.67 998,1158.63 998,1252.63 967.11,1283.52 815,1283.52
NetC137_2: C137.2 DS33.1 R139.2 R140.1 | length 879.2
  Top Layer w10: R139.2@367,1216.25 394.3,1216.25 DS33.1@517.39,1339.34 601.1,1255.63 720.45,1255.63 C137.2@812.8,1347.97 888.99,1271.78 960.85,1271.78 1025.9,1206.73 R140.1@1063.75,1206.73
NetC139_2: C139.2 DS34.1 R141.2 R142.1 | length 1107.5
  Top Layer w10: R141.2@367,1383.31 v2(402.05,1383.31) ; v2(1024.48,1301.63) 1033.9,1301.63 R142.1@1063.75,1271.78
  Bottom Layer w10: v2(402.05,1383.31) 402.05,1495.68 432.25,1525.88 DS34.1@526.2,1525.88 607.38,1444.7 810,1444.7 ; C139.2@812.8,1560 812.8,1447.49 810,1444.7 ; v2(1024.48,1301.63) 1024.48,1411.12 990.91,1444.7 810,1444.7
NetC141_2: C141.2 DS35.1 R143.2 R144.1 | length 986
  Top Layer w10: R143.2@367,1327.62 402,1327.62 429,1354.63 429,1485.63 454.99,1511.62 DS35.1@517.39,1511.62 600.39,1428.63 735.62,1428.63 C141.2@812.8,1505.8 883.97,1434.63 957,1434.63 1054.79,1336.84 R144.1@1063.75,1336.84
NetC156_1: C156.1 R165.2 R174.1 U17.8 | length 1474
  Top Layer w10: 2898.89,1927 2852.37,1927 2838,1912.63 2838,1812.63 2894.06,1756.57 R165.2@2917,1756.57 2994.43,1756.57 C156.1@2995,1756 2995,1726.63 3010,1711.63 v2(3088,1711.63) ; U17.8@3136,1977 3342,1977 3354,1989 v2(3354,2095.63) ; R174.1@3322,2095.75 3353.88,2095.75 v2(3354,2095.63) ; v2@3349,2090.63 v2(3354,2095.63)
  Bottom Layer w10: v2(3088,1711.63) 3088,2060.63 3123.12,2095.75 v2@3353.88,2095.75
NetC156_2: C156.2 R170.2 U17.9 | length 334.4
  Top Layer w10: C156.2@3055,1756 3057,1758 R170.2@3057,1827 3057,1999 3085,2027 U17.9@3136,2027
NetC157_1: C157.1 R167.2 R168.1 U17.14 | length 1516.5
  Top Layer w10: R168.1@2787.65,1446.94 2787.65,1375.35 C157.1@2791,1372 2818.37,1372 2836,1389.63 v2(2836,1411.63) ; v2(3048.63,2262) 3063.63,2277 U17.14@3136,2277 3213,2277 3263.37,2226.63 3306,2226.63 3322,2210.63 R167.2@3322,2177
  Bottom Layer w10: v2(2836,1411.63) 2984,1411.63 3048.63,1476.26 v2(3048.63,2262)
NetC157_2: C157.2 C158.1 R176.1 | length 140.8
  Top Layer w10: R176.1@2786.69,1246 2791,1250.32 C157.2@2791,1312 C158.1@2864,1312
NetC158_2: C158.2 R169.2 U1.3 | length 196.1
  Top Layer w10: R169.2@2864,1446.94 C158.2@2864,1372 2875,1372 2919,1328 U1.3@2966.89,1328
NetC159_1: C159.1 C160.1 R165.1 R170.1 | length 498.7
  Top Layer w10: C160.1@2606,1838 2608,1836 C159.1@2683,1836 2683,1797.63 2701.63,1779 v2(2807,1779) ; R165.1@2917,1815.63 v2(2957,1815.63) 2986.57,1815.63 R170.1@2997.94,1827
  Bottom Layer w10: v2(2807,1779) 2920.37,1779 v2(2957,1815.63)
NetC159_2: C159.2 R173.1 | length 78.1
  Top Layer w10: R173.1@2738,1912 2743,1907 C159.2@2743,1836
NetC161_1: C161.1 C162.1 R176.2 U1.6 U1.7 | length 309.5
  Top Layer w10: R176.2@2845.74,1246 2845.74,1187.26 C162.1@2852,1181 C161.1@2852,1114 2895,1114 2909,1128 U1.7@2966.89,1128 U1.6@2966.89,1178 ; U1.6@2963.89,1181 U1.6@2966.89,1184
NetC161_2: C161.2 C162.2 R168.2 R169.1 | length 554.6
  Top Layer w10: R168.2@2787.65,1506 R169.1@2864,1506 ; C161.2@2792,1114 v2(2792,1149.63) C162.2@2792,1181
  Bottom Layer w10: v2(2792,1149.63) 2764,1177.63 2764,1471.63 2797,1504.63 v2(2828,1504.63)
NetC163_1: C163.1 R173.2 R177.1 U17.7 | length 282.7
  Top Layer w10: R173.2@2678.94,1912 2678,1912.94 C163.1@2678,1970.94 2745,1970.94 R177.1@2746,1971.94 2893.84,1971.94 U17.7@2898.89,1977
NetD5_2: D5.2 R164.1 | length 61.4
  Top Layer w10: R164.1@3451,935.04 3452,936.04 D5.2@3452,996.04
NetD6_2: D6.2 R163.1 | length 68.1
  Top Layer w10: R163.1@3057,810 3057.75,810.75 D6.2@3057.75,877.78
NetP11_1: P11.1 R52.1 | length 582.1
  Top Layer w10: v2(2342.63,1779) 2371.91,1779 R52.1@2376.91,1784
  Bottom Layer w10: P11.1@1796.91,1779 v2(2342.63,1779)
NetP12_3: P12.3 P13.3 U9.62 | length 422.5
  Top Layer w10: U9.62@2010.8,2641.54 2010.8,2703.43 2132,2824.63 P12.3@2132,2864 2130,2866 P13.3@2130,3013
NetP13_2: P13.2 U8.6 U8.7 | length 2285.5
  Top Layer w10: v2(1651,2772) 1651,2888 1595.19,2943.81 1595.19,3046.81 1650,3101.63 1997,3101.63 2030,3068.63 P13.2@2030,3013 ; U8.6@1984.3,1843 U8.7@1984.3,1793 2039,1793 v2(2058,1812)
  Bottom Layer w10: v2(1651,2772) 1651,1876.63 1702,1825.63 2044.37,1825.63 v2(2058,1812)
NetP14_1: P14.1 P15.3 | length 196.7
  Top Layer w10: P14.1@2470.91,1644 2665.63,1644 P15.3@2667,1642.63
NetP14_2: P14.2 U9.17 | length 1024.4
  Top Layer w10: U9.17@1971.43,2149.41 1971.43,2023.2 2028,1966.63 2390,1966.63 v2(2423,1933.63)
  Bottom Layer w10: v2(2423,1933.63) 2423,1591.91 P14.2@2470.91,1544
NetP14_3: P14.3 U11.1 U11.2 | length 246.8
  Top Layer w10: U11.2@2274.51,1495 U11.1@2274.51,1445 2469.91,1445 P14.3@2470.91,1444
NetP15_1: P15.1 U9.18 | length 1503.6
  Top Layer w10: U9.18@1991.11,2149.41 1991.11,2039.52 2044,1986.63 2410,1986.63 2481,2057.63 v2(2646,2057.63)
  Bottom Layer w10: v2(2646,2057.63) 2738,1965.63 2738,1513.63 P15.1@2667,1442.63 ; P15.1@2660,1442.63 P15.1@2663.5,1446.13
NetP15_2: P15.2 R92.1 | length 329
  Top Layer w10: R92.1@2361.91,1485 2397.37,1485 2407.37,1495 2576.91,1495 2624.54,1542.63 P15.2@2667,1542.63
NetP17_1: P17.1 R102.1 | length 161
  Top Layer w10: R102.1@2305,445 2386.63,445 2398.63,433 P17.1@2461,433
NetP18_3: P18.3 P19.3 U13.62 | length 1498.3
  Top Layer w10: U13.62@1983.89,1259 1983.89,1318.52 v2(1985,1319.63) ; v2(2155.18,1443.63) 2155.18,1369.51 2168.06,1356.63 v2(2709,1356.63) ; P18.3@2508,990 2654,990 P19.3@2656,992
  Bottom Layer w10: v2(1985,1319.63) 1985,1350.33 2078.3,1443.63 v2(2155.18,1443.63) ; P19.3@2656,992 2744,1080 2744,1321.63 v2(2709,1356.63)
NetP19_2: P19.2 U11.6 U11.7 | length 1154.7
  Top Layer w10: U11.6@1975.3,1545 U11.7@1975.3,1495 2033.63,1495 2087,1441.63 v2(2087,1422.63) ; v2@2233,1333.68 2694.94,1333.68 v2(2709,1319.63)
  Bottom Layer w10: v2(2087,1422.63) 2210,1422.63 2233,1399.63 v2(2233,1334.63) ; P19.2@2656,1092 2709,1145 v2(2709,1319.63)
NetP20_1: P20.1 P21.3 | length 158
  Top Layer w10: P21.3@2592,530 P20.1@2750,530
NetP20_2: P20.2 U13.17 | length 1264.4
  Top Layer w10: v2(1934,638.63) 1934,677.63 1944.52,688.15 U13.17@1944.52,766.87 ; v2(2045,492.63) 2045,575.63 2076,606.63 2356,606.63 v2(2369.63,593) ; v2(2369.63,480.63) 2699.37,480.63 P20.2@2750,430
  Bottom Layer w10: v2(1934,638.63) 1934,603.63 v2(2045,492.63) ; v2(2369.63,480.63) v2(2369.63,593)
NetP20_3: P20.3 U14.1 U14.2 | length 642.5
  Top Layer w20: U14.1@2207.61,159 U14.2@2207.61,209 2350.37,209 2401.37,260 2680,260 P20.3@2750,330
NetP21_1: P21.1 U13.18 | length 976.5
  Top Layer w10: v2@1964.2,638.63 U13.18@1964.2,766.87 ; v2(2078,367.63) 2554.37,367.63 P21.1@2592,330
  Bottom Layer w10: v2(1963,638.63) 1963,614.63 2078,499.63 v2(2078,367.63)
NetP21_2: P21.2 R136.1 | length 567
  Top Layer w10: R136.1@2299,320 2507.09,320 2542,285.09 2636.46,285.09 2666,314.63 2666,402.63 2638.63,430 P21.2@2592,430
NetQ18_1: Q18.1 RC2.1 | length 95.9
  Top Layer w10: RC2.1@2362,2820 2443.76,2820 Q18.1@2453.79,2830.03
NetQ19_1: Q19.1 RC1.1 | length 82.3
  Top Layer w10: Q19.1@2772.21,3010.09 2849.46,3010.09 RC1.1@2853,3013.63
NetQ20_1: Q20.1 RC4.1 RC8.2 | length 139.9
  Top Layer w10: RC4.1@2309,3084.43 2445.19,3084.43 Q20.1@2447.79,3087.03
NetQ20_2: Q20.2 RC7.1 | length 72.8
  Top Layer w10: RC7.1@2445,2940.63 2447.79,2943.42 Q20.2@2447.79,3012.23
NetQ21_1: Q21.1 RC3.1 RC5.2 | length 167
  Top Layer w20: Q21.1@2771.21,2749.23 2777.44,2743 RC5.2@2867,2743 2933.37,2743 RC3.1@2935,2744.63
NetQ21_2: Q21.2 RC6.1 | length 62.2
  Top Layer w10: Q21.2@2771.21,2824.03 2780,2832.82 RC6.1@2780,2882.63
NetR52_2: R52.2 U8.3 | length 93.8
  Top Layer w10: U8.3@2283.51,1843 2375.91,1843 R52.2@2376.91,1844
NetR53_2: R53.2 R54.2 R54.3 U9.60 | length 1617.1
  Top Layer w10: R54.3@1149,3362.63 R54.2@1249,3362.63 1249,3279.63 1283,3245.63 v2(1624,3245.63) ; v2(1707,2975.63) 1707,2900.63 v2(1896,2711.63) ; v2(2050.17,2560.63) U9.60@2050.17,2641.54
  Bottom Layer w10: v2(1624,3245.63) 1624,3058.63 v2(1707,2975.63) ; v2(1896,2711.63) 1896,2655.63 1927,2624.63 1992,2624.63 2013.94,2602.69 R53.2@2013.94,2530 2019.54,2530 v2(2050.17,2560.63)
NetR71_2: R71.2 R76.1 U8.5 | length 174.2
  Top Layer w10: R71.2@1891.91,1812 1892.91,1813 R76.1@1892.91,1894 1893.91,1893 U8.5@1984.3,1893
NetR83_2: R83.2 U9.35 U9.36 | length 239.1
  Top Layer w10: U9.35@2365.13,2287.2 2464,2287.2 ; U9.36@2365.13,2306.89 2444.31,2306.89 2464,2287.2 ; R83.2@2497,2286.63 2496.43,2287.2 2464,2287.2
NetR92_2: R92.2 U11.3 | length 87.4
  Top Layer w10: U11.3@2274.51,1545 R92.2@2361.91,1545
NetR102_2: R102.2 U12.3 | length 102.1
  Top Layer w10: U12.3@2202.92,505 R102.2@2305,505
NetR103_2: R103.2 R104.2 R104.3 U13.60 | length 1946.4
  Top Layer w10: R104.3@1181,143.63 R104.2@1281,143.63 ; U13.60@2023.26,1259 2023.26,1211.37 v2(2027,1207.63) 2026,1206.63 v2(2026,1018.63)
  Bottom Layer w10: R104.2@1281,143.63 1281,918.63 1395,1032.63 1788,1032.63 1802,1018.63 v2(2026,1018.63) ; R103.2@2027,1176.63 v2(2027,1207.63)
NetR117_2: R117.2 R122.1 U11.5 | length 176.5
  Top Layer w10: R122.1@1802.91,1585 1864.91,1585 R117.2@1865.91,1586 1897.08,1586 1906.08,1595 U11.5@1975.3,1595
NetR127_2: R127.2 U13.35 U13.36 | length 198.7
  Top Layer w10: U13.36@2338.22,924.35 U13.35@2338.22,904.67 2415.96,904.67 2445.49,875.14 R127.2@2505,875.14
NetR136_2: R136.2 U14.3 | length 91.8
  Top Layer w10: U14.3@2207.61,259 2298,259 R136.2@2299,260
NetR166_1: R166.1 R172.2 U17.3 | length 225.3
  Top Layer w20: R172.2@2674,2178.06 R166.1@2742,2178.06 2897.84,2178.06 U17.3@2898.89,2177
NetR167_1: R167.1 R174.2 U17.13 | length 254.2
  Top Layer w10: U17.13@3136,2227 3227,2227 3262.94,2191.06 R167.1@3262.94,2177 R174.2@3262.94,2095.75 3245.88,2095.75
NetR171_2: R171.2 U17.5 | length 310.3
  Top Layer w10: R171.2@2606,2119 2646.37,2078.63 2897.26,2078.63 U17.5@2898.89,2077
NetR175_2: R175.2 R178.1 U1.5 | length 348.3
  Top Layer w20: U1.5@2966.89,1228 3022.96,1228 3055,1195.96 R178.1@3055,1020 R175.2@3055,949
NetR179_2: R179.2 U17.10 | length 152.8
  Top Layer w20: U17.10@3136,2077 3168,2077 3230.5,2014.5 R179.2@3262.94,2014.5
OUT1: P2.1 RC1.2 | length 2900.4
  Top Layer w10: P2.1@395.37,3402.63 395.37,3450 426,3480.63 2810,3480.63 2853,3437.63 RC1.2@2853,3072.69
OUT2: P2.2 RC2.2 | length 2316.4
  Top Layer w10: P2.2@495.37,3402.63 680.37,3217.63 939,3217.63 979,3177.63 2180,3177.63 2226,3131.63 2226,2817.63 2282.69,2760.94 RC2.2@2362,2760.94
OUT3: P2.3 RC4.2 | length 1929.1
  Top Layer w10: P2.3@595.37,3402.63 732.37,3265.63 946,3265.63 1015,3196.63 2187,3196.63 2242,3141.63 2242,3040.63 2257.26,3025.37 RC4.2@2309,3025.37
OUT4: P2.4 RC3.2 | length 2644.1
  Top Layer w10: P2.4@695.37,3402.63 808.37,3289.63 953,3289.63 1025,3217.63 2192,3217.63 2265,3144.63 v2(2265,3092.63) ; RC3.2@2935,2803.69 v2(2935,2838.63)
  Bottom Layer w10: v2(2265,3092.63) 2861,3092.63 2935,3018.63 v2(2935,2838.63)
PD+: C163.2 P26.1 R177.2 U17.6 | length 2839.5
  Top Layer w10: v2(2928,2553.63) 3022,2647.63 v2(3101,2647.63)
  Top Layer w30: C163.2@2678,2030 2745,2030 R177.2@2746,2031 2877,2031 2881,2027 U17.6@2898.89,2027
  Bottom Layer w10: P26.1@1878,3311.06 1878,3226.63 1903,3201.63 3032,3201.63 3103,3130.63 3101,3128.63 v2(3101,2647.63) ; v2(2818,2027.63) 2818,2085.63 2837.5,2105.13 2837.5,2463.13 v2(2928,2553.63)
PD-: P26.2 R171.1 R179.1 U17.1 U17.2 U17.12 | length 3310.1
  Top Layer w10: R171.1@2606,2178.06 2606,2198.63 2634.37,2227 U17.2@2898.89,2227 ; U17.1@2898.89,2277 U17.2@2898.89,2227 ; v2(3081,2498.63) 3081,2339.37 2979,2237.37 2979,2216.63 ; R179.1@3322,2014.5 3322,2038.63 3303,2057.63 3242,2057.63 3207,2092.63 3207,2162 3192,2177 U17.12@3136,2177 3018.63,2177 2979,2216.63 ; U17.2@2898.89,2227 2968.63,2227 2979,2216.63
  Bottom Layer w10: P26.2@1778,3315 1778,3194.63 1818,3154.63 2996,3154.63 3080,3070.63 v2@3080,2499.63
RD: JC2.1 JC3.2 Q19.3 Q21.3 | length 1248.4
  Top Layer w15: Q21.3@2672.79,2786.63 2673.79,2787.63 Q19.3@2673.79,3047.5 2673.79,3130.47 2701.33,3158.02 JC2.1@2701.33,3311.06
  Bottom Layer w15: JC3.2@2189.67,3315 2189.67,3403.3 2225,3438.63 2650,3438.63 2701.33,3387.3 JC2.1@2701.33,3311.06
TA: JC1.1 P2.6 R158.1 | length 2840.9
  Top Layer w10: P2.6@895.37,3402.63 951.37,3458.63 2776,3458.63 2812,3422.63 2812,3055.63 2826,3041.63 2912,3041.63 2951.37,3081 R158.1@3055,3081 3055,3154.89 3113,3212.89 JC1.1@3113,3311.06
TB: JC1.2 P2.5 R160.2 TVS41.2 | length 3071.6
  Top Layer w10: P2.5@795.37,3402.63 858.37,3339.63 926,3339.63 1019,3432.63 v2(2737,3432.63) ; JC1.2@3015,3317 JC1.2@3013,3315 3013,3402 3049,3438 3163,3438 3194,3407 3194,3360 TVS41.2@3194,3082 3192,3080 R160.2@3127,3080
  Bottom Layer w10: v2(2737,3432.63) 2979.37,3432.63 3013,3399 JC1.2@3013,3315
VDD5V_OUT: C155.2 D5.1 D6.1 P1.14 R166.2 U1.4 U17.4 | length 5366.9
  Top Layer w10: R166.2@2742,2119 v2(2786,2119) 2797.37,2119 2805.37,2127 U17.4@2898.89,2127 ; v2(2786,2381.63) 2973.37,2381.63 C155.2@2978,2377
  Top Layer w20: v1(2787,2653.63) 2937,2653.63 3061,2777.63 v1(3467,2777.63) ; U1.4@2966.89,1278 3033,1278 3042,1287 v1(3042,1328) ; D6.1@3117.75,877.78 3136.15,877.78 3152,893.63 v1(3152,975.63) ; v1(3121,1328.63) 3121,1110.63 3152,1079.63 v1(3152,975.63) ; v1(3467,2375.63) 3467,1247.63 3392,1172.63 D5.1@3392,996.04 3310,996.04 3289.59,975.63 v1(3152,975.63)
  Bottom Layer w20: v2(2786,2119) v2(2786,2381.63) 2786,2410 2784,2412 2784,2424.63 2784,2524.84 2786,2526.84 v1@2786,2652.63 ; P1.14@3013.02,83 3093.37,83 3152,141.63 v1(3152,975.63) ; v1(3042,1328) 3120.37,1328 v1(3121,1328.63) ; v1(3467,2375.63) v1(3467,2777.63)
pads on no net: U1.8 U1.9 U1.10 U1.12 U1.13 U1.14 U9.27 U9.29 U9.42 U9.44 U9.45 U9.46 U9.64 U12.5 U12.6 U12.7 U13.27 U13.29 U13.42 U13.44 U13.45 U13.46 U13.64 U14.5 U14.6 U14.7

## Polygon pours and split planes (outlines as drawn)
AVSS on Top Layer "Top Layer-No Net" (solid, remove dead copper, pour order 5): -282,3647.63 1477,3647.63 2166,3647.63 2166,2866.63 2191.5,2866.63 2199,2866.63 2199,2564.63 2039,2564.63 2039,2377 2122.63,2377 2123,2376.63 2123,2191.63 2296,2191.63 2296,2092.72 2426,2092.72 2426,1881.63 2181.63,1881.63 2181,1881 2181,1646.63 2323,1646.63 2323,1464.63 2134,1464.63 2134,1309.13 2242,1309 2242,841.63 2424,841.63 2424,611.63 2423,610.63 2970,610.63 2971,611.63 2971,461.63 2847,461.63 2846,462.63 2846,219.63 2587,219.63 2587,-165.37 2670,-248.37 2664,-254.37 -213,-254.37 -213,616.63 -267,670.63 -233,704.63 -233,3646.63
GND on Top Layer "Top Layer-No Net" (solid, remove dead copper, pour order 7): 2206,4288.63 2206,2876.63 2206,2554.63 2207,2553.63 2062,2553.63 2062,2384.63 2127.12,2384.63 2127.12,2194.63 2305,2194.63 2305,2100.63 2435,2100.63 2435,1865.63 2195,1865.63 2195,1655.63 2213,1655.63 2328.95,1655.63 2330,1654.58 2330,1430.63 2140.92,1430.63 2140.73,1330.63 2260,1330.63 2260,855.63 2444.78,855.63 2444.78,625.85 2980,625.63 2980,440.63 2860.85,440.63 2860,441.48 2855,441.48 2855,355.63 2855,213.63 2642.14,213.63 2642,-69.37 2637,-74.37 2650,-61.37 3836,-61.37 3836,4299.63 3919,4382.63 3151,3614.63 1532,3614.63
GND on Bottom Layer "Top Layer-No Net" (solid, remove dead copper, pour order 9): 2206,4288.63 2206,2876.63 2206,2554.63 2207,2553.63 2062,2553.63 2062,2384.63 2127.12,2384.63 2127.12,2194.63 2305,2194.63 2305,2100.63 2435,2100.63 2435,1865.63 2195,1865.63 2195,1655.63 2213,1655.63 2328.95,1655.63 2330,1654.58 2330,1430.63 2106.19,1430.63 2106,1330.63 2260,1330.63 2260,855.63 2444.78,855.63 2444.78,625.85 2980,625.63 2980,440.63 2860.85,440.63 2860,441.48 2855,441.48 2855,355.63 2855,245.48 2642.15,245.48 2642,-69.37 2637,-74.37 2650,-61.37 3836,-61.37 3836,4299.63 3919,4382.63 3151,3614.63 1532,3614.63
AVSS on Bottom Layer "Top Layer-No Net" (solid, remove dead copper, pour order 11): -282,3647.63 1477,3647.63 2168,3647.63 2168,2866.63 2191.5,2866.63 2199,2866.63 2199,2564.63 2039,2564.63 2039,2377 2122.63,2377 2123,2376.63 2123,2191.63 2296,2191.63 2296,2092.72 2426,2092.72 2426,1881.63 2181.63,1881.63 2181,1881 2181,1646.63 2323,1646.63 2323,1464.63 2082.5,1464.63 2082.5,1309.18 2242,1309 2242,841.63 2424,841.63 2424,611.63 2423,610.63 2970,610.63 2971,611.63 2971,461.63 2847,461.63 2846,462.63 2846,259 2589.63,259 2587,261.63 2587,-165.37 2670,-248.37 2664,-254.37 -213,-254.37 -213,616.63 -267,670.63 -233,704.63 -233,3646.63

## Keep-outs
Keep-Out Layer:
  circle w5: c96.8,136.8 r118.11
  lines w10: -909,11193.01 cw(c-903.43,11148.07) -858.49,11153.64 ; -39.37,3463.57 -39.37,38.37 ccw(c0,38.37) 0,-1 3660.79,-1 ; -39.37,3464 cw(c0,3464) 0,3503.37 ; -10,3503.37 3660.79,3503.37 ; 3648.86,3503.37 cw(c3654.43,3458.43) 3699.37,3464 ; 3660,-1 ccw(c3660,38.37) 3699.37,38.37 3699.37,3463.57
Mechanical 1:
  lines w10: -39.37,3464.57 -39.37,39.37 ccw(c0,39.37) 0,0 3660.79,0 ; -39.37,3465 cw(c0,3465) 0,3504.37 ; 1,3504.37 3660.79,3504.37 ; 3648.86,3504.37 cw(c3654.43,3459.43) 3699.37,3465 ; 3660,0 ccw(c3660,39.37) 3699.37,39.37 3699.37,3464.57

## Silkscreen, mask and mechanical layers (free items; w line width, h text height)
Top Overlay:
  circle w19.68: c95.8,3353 r98.43
  circle w19.68: c3552,3374 r98.43
  circle w19.68: c3554,135 r98.43
  circle w19.68: c97.8,137.8 r98.43
  lines w30: -27,3187 24,3187 1713,3187 1713,303 911,303 ; -21,302 386,302 386,124 911,124 911,302
  text "血氧、体温" at 2425,3601 h100
  text "脑电、心电、肌电" at -905,1665 h100

## Text inside footprints (layer, text, board x,y; h text height)
C155: Mechanical 1 "C9" at 3048.35,2402 h50 r180
C156: Mechanical 1 "C9" at 2984.65,1731 h50
C157: Mechanical 1 "C9" at 2766,1382.35 h50 r270
C158: Mechanical 1 "C9" at 2889,1301.65 h50 r90
C159: Mechanical 1 "C9" at 2672.65,1811 h50
C160: Mechanical 1 "C9" at 2631,1827.65 h50 r90
C161: Mechanical 1 "C9" at 2862.35,1139 h50 r180
C162: Mechanical 1 "C9" at 2862.35,1206 h50 r180
P1: Bottom Overlay "2" at 2293.02,103 h50 r180; Bottom Overlay "1" at 2293.02,203 h50 r180; Bottom Overlay "14" at 3093.02,103 h50 r180; Bottom Overlay "13" at 3093.02,203 h50 r180
P16: Top Overlay "2" at 71,1749 h50 r90; Top Overlay "1" at 171,1749 h50 r90; Top Overlay "25" at 171,3109 h50 r90; Top Overlay "26" at 71,3109 h50 r90
P29: Top Overlay "2" at 73,364 h50 r90; Top Overlay "1" at 173,364 h50 r90; Top Overlay "26" at 73,1724 h50 r90